# EAGLE board H02 (EAGLE 6.6.0)
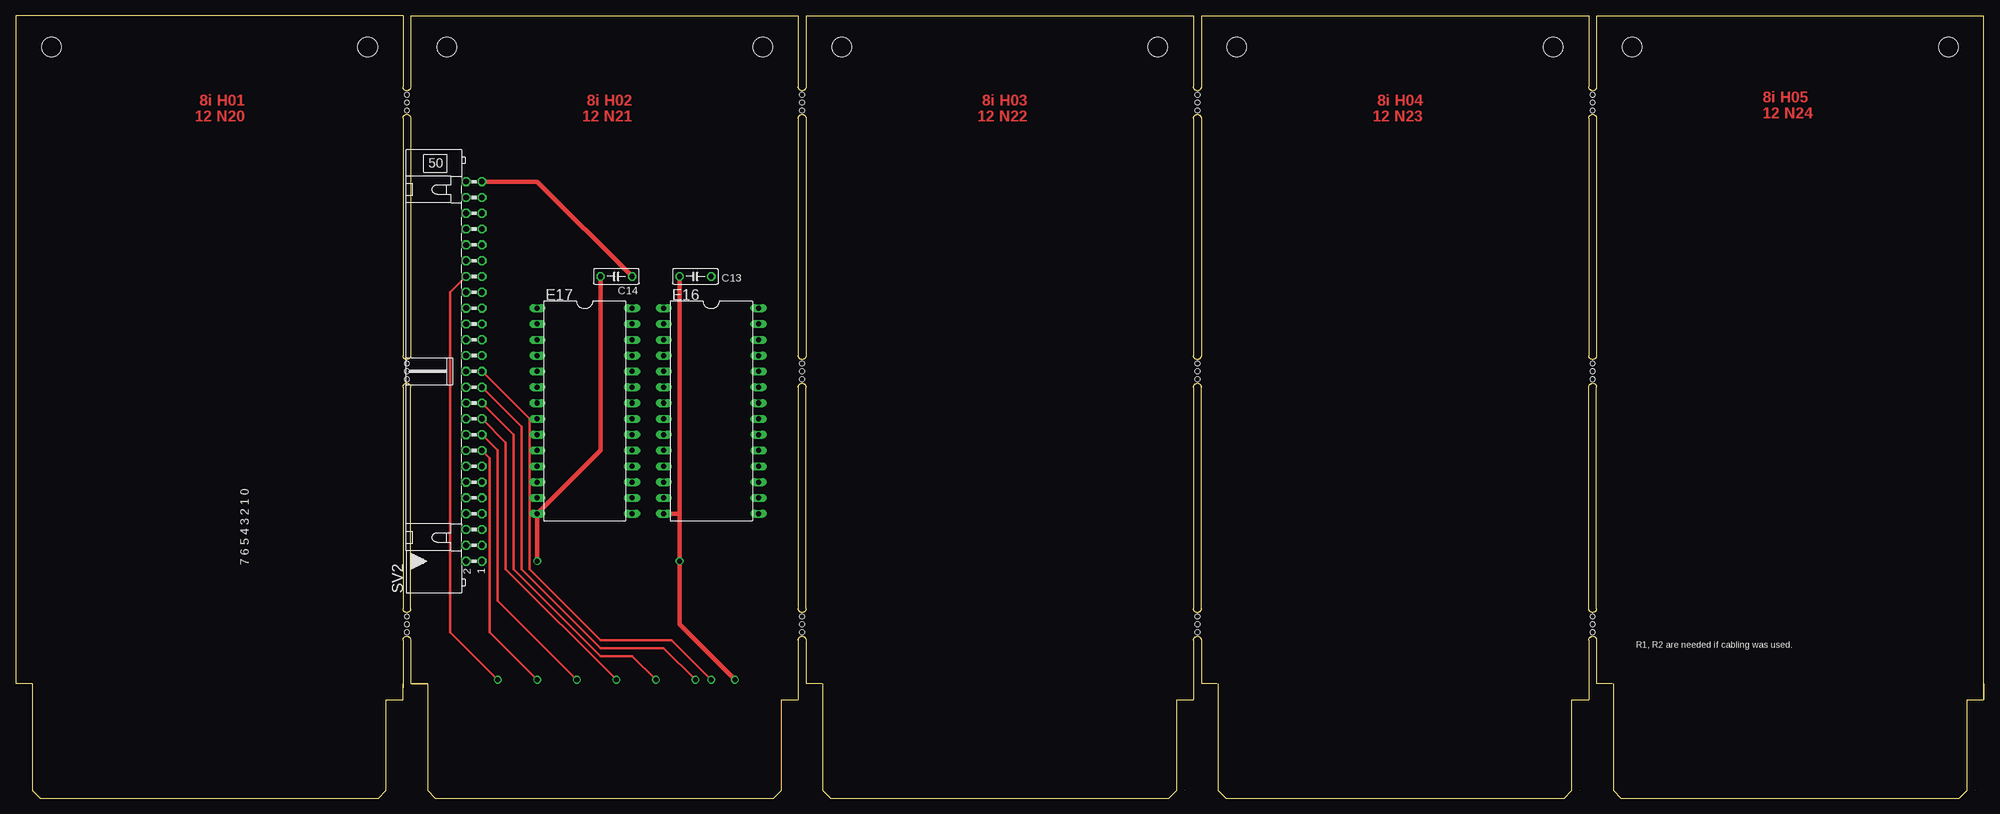
[diagram p0: board, top side]
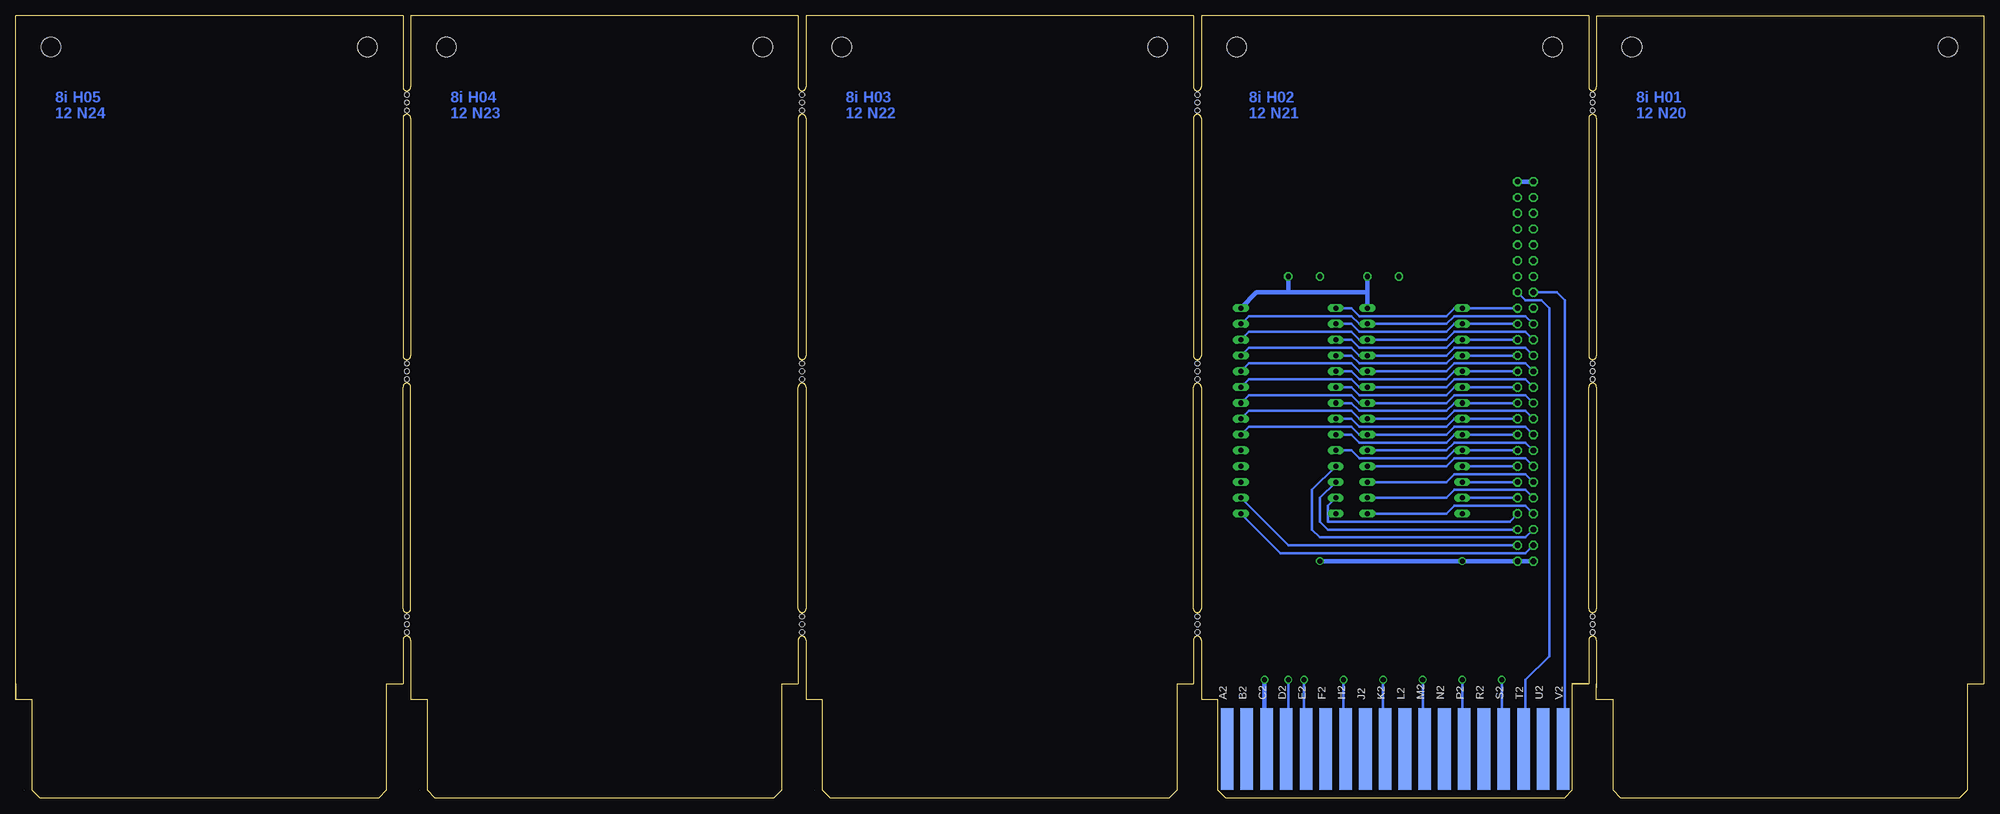
[diagram p1: board, bottom side, seen from below]

Size 316.23 x 125.73 mm. Coordinates in mm from the lower left corner, seen from the top.
Copper layers (1+16): Top 0.035mm / dielectric 1.5mm / Bottom 0.035mm
Design rules "16mils": minimum track width 16mil, minimum drill 32mil, track to track 15mil, track to pad 10mil, pad to pad 10mil, via to via 10mil, smd to smd 10mil, copper to edge 13mil, drill to drill 10mil, minimum pad ring 10mil, minimum via ring 8mil, stop-mask expansion 0mil, vias tented up to drill 0mil, thermal gap 10mil
Net classes: 1 supply: width 0.711 mm

## Footprints (pad centres in the part's own frame; a part is rotated, then mirrored left to right if it is on the bottom)
C050-025X075 = drill 0.813 octagon: 1 -2.54,0; 2 2.54,0
DIL28-6 = drill 0.813 long: 1 -16.51,-7.62; 2 -13.97,-7.62; 3 -11.43,-7.62; 4 -8.89,-7.62; 5 -6.35,-7.62; 6 -3.81,-7.62; 7 -1.27,-7.62; 8 1.27,-7.62; 9 3.81,-7.62; 10 6.35,-7.62; 11 8.89,-7.62; 12 11.43,-7.62; 13 13.97,-7.62; 14 16.51,-7.62; 15 16.51,7.62; 16 13.97,7.62; 17 11.43,7.62; 18 8.89,7.62; 19 6.35,7.62; 20 3.81,7.62; 21 1.27,7.62; 22 -1.27,7.62; 23 -3.81,7.62; 24 -6.35,7.62; 25 -8.89,7.62; 26 -11.43,7.62; 27 -13.97,7.62; 28 -16.51,7.62
EDGE-CON1 = smd 13.106 x 2.032 bottom: A2 7.938,4.128; B2 7.938,7.303; C2 7.938,10.477; D2 7.938,13.652; E2 7.938,16.828; F2 7.938,20.003; H2 7.938,23.177; J2 7.938,26.352; K2 7.938,29.527; L2 7.938,32.703; M2 7.938,35.877; N2 7.938,39.053; P2 7.938,42.227; R2 7.938,45.403; S2 7.938,48.578; T2 7.938,51.752; U2 7.938,54.928; V2 7.938,58.102
ML50L = drill 0.914 octagon: 1 -30.48,-1.27; 2 -30.48,1.27; 3 -27.94,-1.27; 4 -27.94,1.27; 5 -25.4,-1.27; 6 -25.4,1.27; 7 -22.86,-1.27; 8 -22.86,1.27; 9 -20.32,-1.27; 10 -20.32,1.27; 11 -17.78,-1.27; 12 -17.78,1.27; 13 -15.24,-1.27; 14 -15.24,1.27; 15 -12.7,-1.27; 16 -12.7,1.27; 17 -10.16,-1.27; 18 -10.16,1.27; 19 -7.62,-1.27; 20 -7.62,1.27; 21 -5.08,-1.27; 22 -5.08,1.27; 23 -2.54,-1.27; 24 -2.54,1.27; 25 0,-1.27; 26 0,1.27; 27 2.54,-1.27; 28 2.54,1.27; 29 5.08,-1.27; 30 5.08,1.27; 31 7.62,-1.27; 32 7.62,1.27; 33 10.16,-1.27; 34 10.16,1.27; 35 12.7,-1.27; 36 12.7,1.27; 37 15.24,-1.27; 38 15.24,1.27; 39 17.78,-1.27; 40 17.78,1.27; 41 20.32,-1.27; 42 20.32,1.27; 43 22.86,-1.27; 44 22.86,1.27; 45 25.4,-1.27; 46 25.4,1.27; 47 27.94,-1.27; 48 27.94,1.27; 49 30.48,-1.27; 50 30.48,1.27
DECPROTO11111 = hole 3.175: 183.515,120.65; 132.715,120.65; 69.266,120.65; 120.066,120.65; 56.566,120.65; 5.766,120.65; 247.015,120.65; 196.215,120.65; 310.515,120.65; 259.715,120.65 | hole 0.813: 62.865,69.85; 62.865,68.58; 62.865,67.31; 62.865,26.67; 62.865,27.94; 62.865,29.21; 62.865,113.03; 62.865,110.49; 62.865,111.76; 126.365,69.85; 126.365,68.58; 126.365,67.31; 126.365,26.67; 126.365,27.94; 126.365,29.21; 126.365,113.03; 126.365,110.49; 126.365,111.76; 189.865,26.67; 189.865,27.94; 189.865,29.21; 189.865,67.31; 189.865,68.58; 189.865,69.85; 189.865,110.49; 189.865,111.76; 189.865,113.03; 253.365,26.67; 253.365,27.94; 253.365,29.21; 253.365,67.31; 253.365,68.58; 253.365,69.85; 253.365,110.49; 253.365,111.76; 253.365,113.03

## Placement (x,y rotation side)
C13  0.1uF  [C050-025X075]  109.22,83.82 180 top
C14  0.1uF  [C050-025X075]  96.52,83.82 180 top
E16  DS1230  [DIL28-6]  111.76,62.23 270 top
E17  DS1230  [DIL28-6]  91.44,62.23 270 top
H02  [EDGE-CON1]  125.73,0 90 top
SV2  [ML50L]  73.66,68.58 90 top
U$6  DECPROTO11111  [DECPROTO11111]  0,0 0 top

## Library data of the parts
C13 C14 = rcl
E16 E17 = memory-hitachi; OC_FARNELL: unknown; OC_NEWARK: unknown
H02 U$6 = dec-con
SV2 = con-ml; OC_FARNELL: unknown; OC_NEWARK: unknown

## Nets
BMA00(1): E16.23 E17.23 SV2.24
BMA01(1): E16.21 E17.21 SV2.20
BMA02(1): E16.24 E17.24 SV2.26
BMA03(1): E16.25 E17.25 SV2.28
BMA04(1): E16.3 E17.3 SV2.29
BMA05(1): E16.4 E17.4 SV2.27
BMA06(1): E16.5 E17.5 H02.D2 SV2.25
BMA07(1): E16.6 E17.6 H02.E2 SV2.23
BMA08(1): E16.7 E17.7 H02.H2 SV2.21
BMA09(1): E16.8 E17.8 H02.K2 SV2.19
BMA10(1): E16.9 E17.9 H02.M2 SV2.17
BMA11(1): E16.10 E17.10 H02.P2 SV2.15
CS(0): E16.20 E17.20 SV2.18
D0: E17.11 SV2.13
D1: E17.12 SV2.11
D2: E17.13 SV2.9
D3: E17.15 SV2.8
D4: E17.16 SV2.10
D5: E17.17 SV2.12
D6: E17.18 SV2.14
D7: E17.19 SV2.16
D8: E16.11 SV2.6
D9: E16.12 SV2.5
D10: E16.13 SV2.7
D11: E16.15 SV2.4
EA0(1): E16.1 E17.1 SV2.33
EA1(1): E16.26 E17.26 SV2.30
EA2(1): E16.2 E17.2 SV2.31
GND [supply]: C13.2 C14.2 E16.14 E17.14 H02.C2 SV2.1 SV2.2
MCBMB00(0): H02.S2 SV2.38
MCBMB01(0): H02.T2 SV2.35
MCBMB02(0): H02.V2 SV2.36
OE(0): E16.22 E17.22 SV2.22
PARITY: E16.16 SV2.3
VCC [supply]: C13.1 C14.1 E16.28 E17.28 SV2.49 SV2.50
WE(0): E16.27 E17.27 SV2.32

## Tracks (layer width: path | path; a pad name or v marks a point on that pad's centre or on a via)
BMA00(1)
  Bottom 0.406: E16.23 118.11,67.31 101.6,67.31 100.33,66.04 E17.23 86.36,66.04 85.09,67.31 73.66,67.31 SV2.24
BMA01(1)
  Bottom 0.406: E16.21 118.11,62.23 101.6,62.23 100.33,60.96 E17.21 86.36,60.96 85.09,62.23 73.66,62.23 SV2.20
BMA02(1)
  Bottom 0.406: E16.24 118.11,69.85 101.6,69.85 100.33,68.58 E17.24 86.36,68.58 85.09,69.85 73.66,69.85 SV2.26
BMA03(1)
  Bottom 0.406: E16.25 118.11,72.39 101.6,72.39 100.33,71.12 E17.25 86.36,71.12 85.09,72.39 73.66,72.39 SV2.28
BMA04(1)
  Bottom 0.406: E16.3 101.6,73.66 100.33,72.39 86.36,72.39 85.09,73.66 E17.3 SV2.29
BMA05(1)
  Bottom 0.406: E16.4 101.6,71.12 100.33,69.85 86.36,69.85 85.09,71.12 E17.4 SV2.27
BMA06(1)  (via drill 0.81)
  Top 0.406: SV2.25 82.55,60.96 82.55,36.83 93.98,25.4 105.41,25.4 v111.76,19.05
  Bottom 0.406: H02.D2 112.08,8.57 111.76,8.89 v111.76,19.05 | E16.5 101.6,68.58 100.33,67.31 86.36,67.31 85.09,68.58 E17.5 SV2.25
BMA07(1)  (via drill 0.81)
  Top 0.406: SV2.23 81.28,59.69 81.28,36.83 93.98,24.13 104.14,24.13 v109.22,19.05
  Bottom 0.406: H02.E2 108.9,8.57 109.22,8.89 v109.22,19.05 | E16.6 101.6,66.04 100.33,64.77 86.36,64.77 85.09,66.04 E17.6 SV2.23
BMA08(1)  (via drill 0.81)
  Top 0.406: SV2.21 80.01,58.42 80.01,36.83 93.98,22.86 99.06,22.86 v102.87,19.05
  Bottom 0.406: H02.H2 102.55,8.57 102.87,8.89 v102.87,19.05 | E16.7 101.6,63.5 100.33,62.23 86.36,62.23 85.09,63.5 E17.7 SV2.21
BMA09(1)  (via drill 0.81)
  Top 0.406: SV2.19 78.74,57.15 78.74,36.83 v96.52,19.05
  Bottom 0.406: H02.K2 96.2,8.57 96.52,8.89 v96.52,19.05 | E16.8 101.6,60.96 100.33,59.69 86.36,59.69 85.09,60.96 E17.8 SV2.19
BMA10(1)  (via drill 0.81)
  Top 0.406: SV2.17 77.47,55.88 77.47,31.75 v90.17,19.05
  Bottom 0.406: H02.M2 89.85,8.57 90.17,8.89 v90.17,19.05 | E16.9 101.6,58.42 100.33,57.15 86.36,57.15 85.09,58.42 E17.9 SV2.17
BMA11(1)  (via drill 0.81)
  Top 0.406: SV2.15 76.2,54.61 76.2,26.67 v83.82,19.05
  Bottom 0.406: H02.P2 83.82,7.62 v83.82,19.05 | E16.10 101.6,55.88 100.33,54.61 86.36,54.61 85.09,55.88 E17.10 SV2.15
CS(0)
  Bottom 0.406: E16.20 118.11,59.69 101.6,59.69 100.33,58.42 E17.20 86.36,58.42 85.09,59.69 73.66,59.69 SV2.18
D0
  Bottom 0.406: E17.11 SV2.13
D1
  Bottom 0.406: SV2.11 E17.12
D2
  Bottom 0.406: SV2.9 E17.13
D3
  Bottom 0.406: E17.15 86.36,45.72 85.09,46.99 73.66,46.99 SV2.8
D4
  Bottom 0.406: E17.16 86.36,48.26 85.09,49.53 73.66,49.53 SV2.10
D5
  Bottom 0.406: E17.17 86.36,50.8 85.09,52.07 73.66,52.07 SV2.12
D6
  Bottom 0.406: E17.18 86.36,53.34 85.09,54.61 73.66,54.61 SV2.14
D7
  Bottom 0.406: E17.19 86.36,55.88 85.09,57.15 73.66,57.15 SV2.16
D8
  Bottom 0.406: E16.11 107.95,49.53 107.95,43.18 106.68,41.91 73.66,41.91 SV2.6
D9
  Bottom 0.406: E16.12 106.68,48.26 106.68,44.45 105.41,43.18 SV2.5
D10
  Bottom 0.406: E16.13 105.41,46.99 105.41,44.45 76.2,44.45 SV2.7
D11
  Bottom 0.406: E16.15 113.03,39.37 73.66,39.37 SV2.4
EA0(1)
  Bottom 0.406: E16.1 101.6,78.74 100.33,77.47 86.36,77.47 85.09,78.74 E17.1 SV2.33
EA1(1)
  Bottom 0.406: E16.26 118.11,74.93 101.6,74.93 100.33,73.66 E17.26 86.36,73.66 85.09,74.93 73.66,74.93 SV2.30
EA2(1)
  Bottom 0.406: E16.2 101.6,76.2 100.33,74.93 86.36,74.93 85.09,76.2 E17.2 SV2.31
GND  (via drill 0.81)
  Top 0.711: C13.2 106.68,45.72 | 106.68,45.72 v106.68,38.1 106.68,27.94 v115.57,19.05 | v83.82,38.1 E17.14 93.98,55.88 C14.2 | E16.14 106.68,45.72
  Bottom 0.711: H02.C2 115.25,8.57 115.57,8.89 v115.57,19.05 | SV2.2 SV2.1 v83.82,38.1 v106.68,38.1
MCBMB00(0)  (via drill 0.81)
  Top 0.406: SV2.38 69.85,81.28 69.85,26.67 v77.47,19.05
  Bottom 0.406: H02.S2 77.47,7.62 v77.47,19.05
MCBMB01(0)
  Bottom 0.406: H02.T2 73.98,8.57 73.66,8.89 73.66,19.05 69.85,22.86 69.85,78.74 71.12,80.01 73.66,80.01 SV2.35
MCBMB02(0)
  Bottom 0.406: H02.V2 67.63,8.57 67.31,8.89 67.31,80.01 68.58,81.28 SV2.36
OE(0)
  Bottom 0.406: E16.22 118.11,64.77 101.6,64.77 100.33,63.5 E17.22 86.36,63.5 85.09,64.77 73.66,64.77 SV2.22
PARITY
  Bottom 0.406: E16.16 111.76,40.64 SV2.3
VCC
  Top 0.711: C14.1 83.82,99.06 SV2.49
  Bottom 0.711: E17.28 99.06,81.28 | 99.06,81.28 111.76,81.28 | 111.76,81.28 116.84,81.28 E16.28 | C13.1 111.76,81.28 | C14.1 99.06,81.28 | SV2.50 SV2.49
WE(0)
  Bottom 0.406: E16.27 118.11,77.47 101.6,77.47 100.33,76.2 E17.27 86.36,76.2 85.09,77.47 73.66,77.47 SV2.32

## Text on the board
Top: 8i H01 | 8i H02 | 8i H03 | 8i H04 | 8i H05 | 12 N20 | 12 N21 | 12 N22 | 12 N23 | 12 N24
Bottom: 8i H01 | 8i H02 | 8i H03 | 8i H04 | 8i H05 | 12 N20 | 12 N21 | 12 N22 | 12 N23 | 12 N24
tPlace: 7 6 5 4 3 2 1 0 | R1, R2 are needed if cabling was used.
tValues: 8i H01 | 8i H02 | 8i H03 | 8i H04 | 8i H05 | 12 N20 | 12 N21 | 12 N22 | 12 N23 | 12 N24 | VCC | GND